# Altium PCB New GT controller.PcbDoc
Units mm, origin at the board's own origin, x right, y up, seen from the top; angles counter-clockwise.
Board outline 122 x 83 mm, 2 copper layers (Top Layer, Bottom Layer); 102 components, 65 nets, 340 pads, 71 vias.
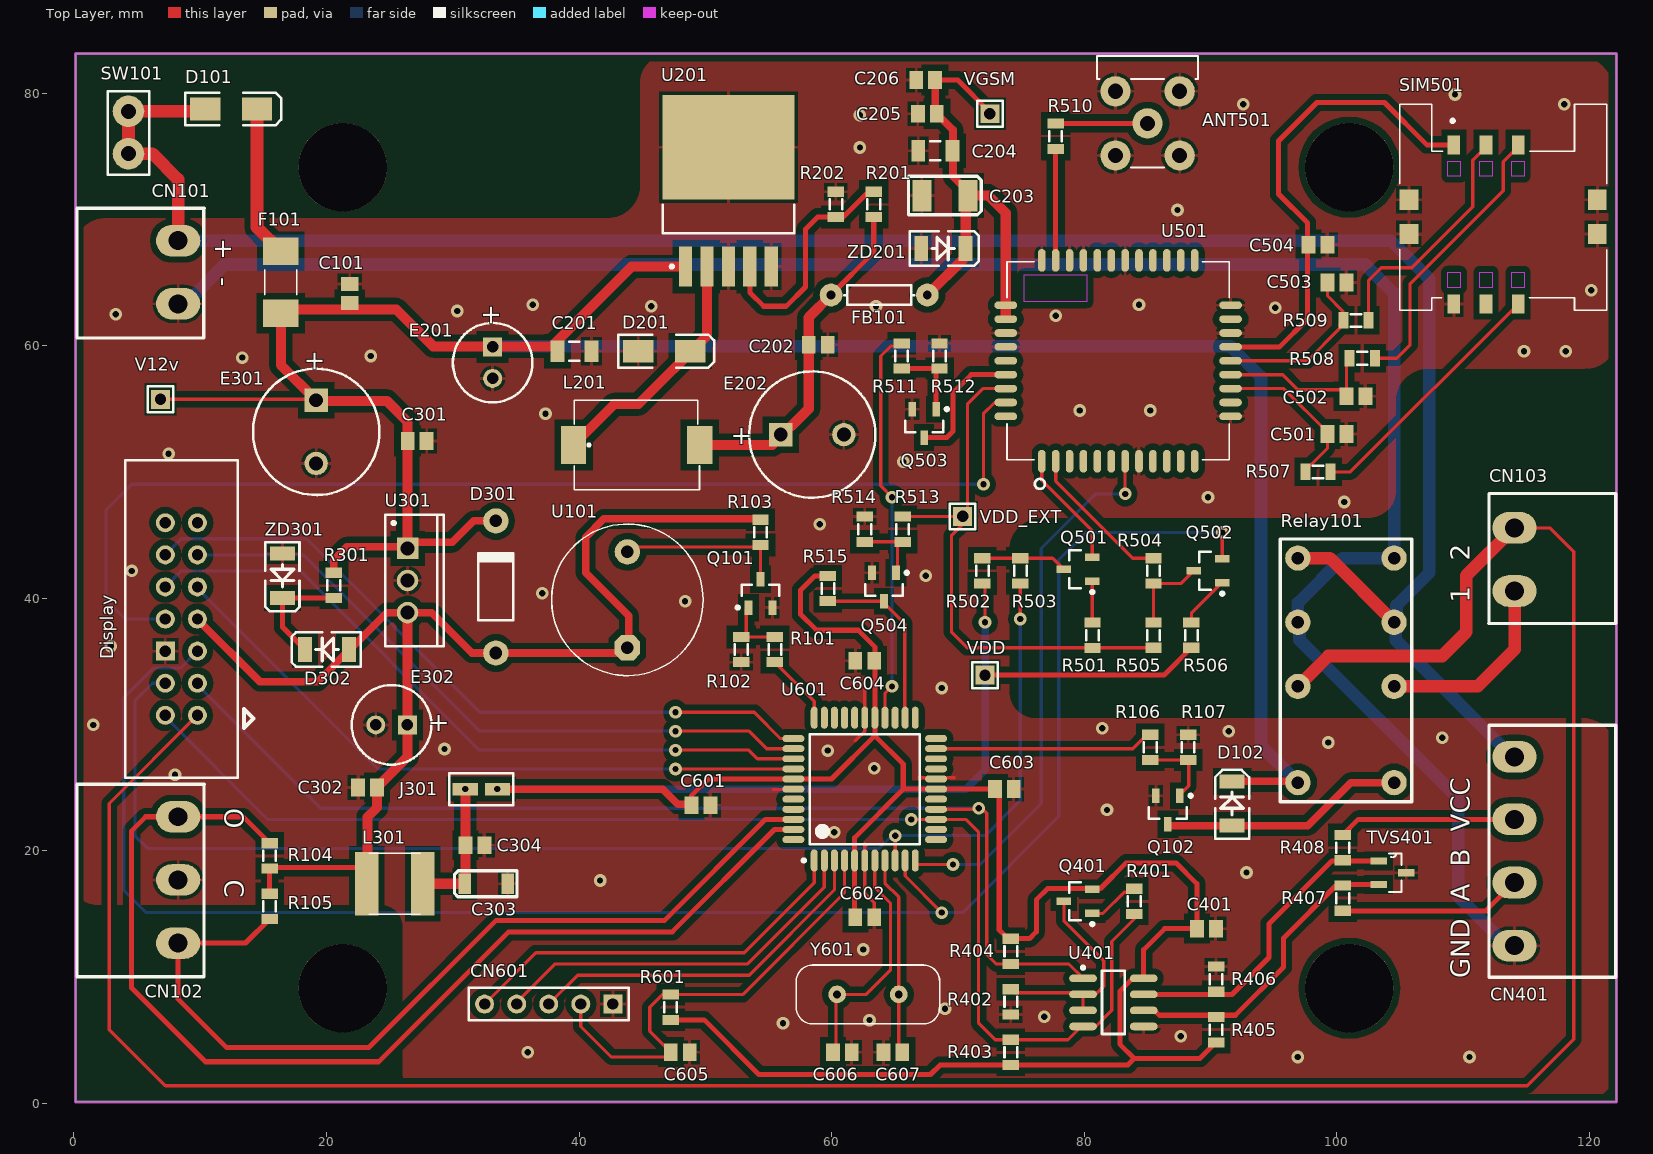
[diagram p0: Top Layer view]
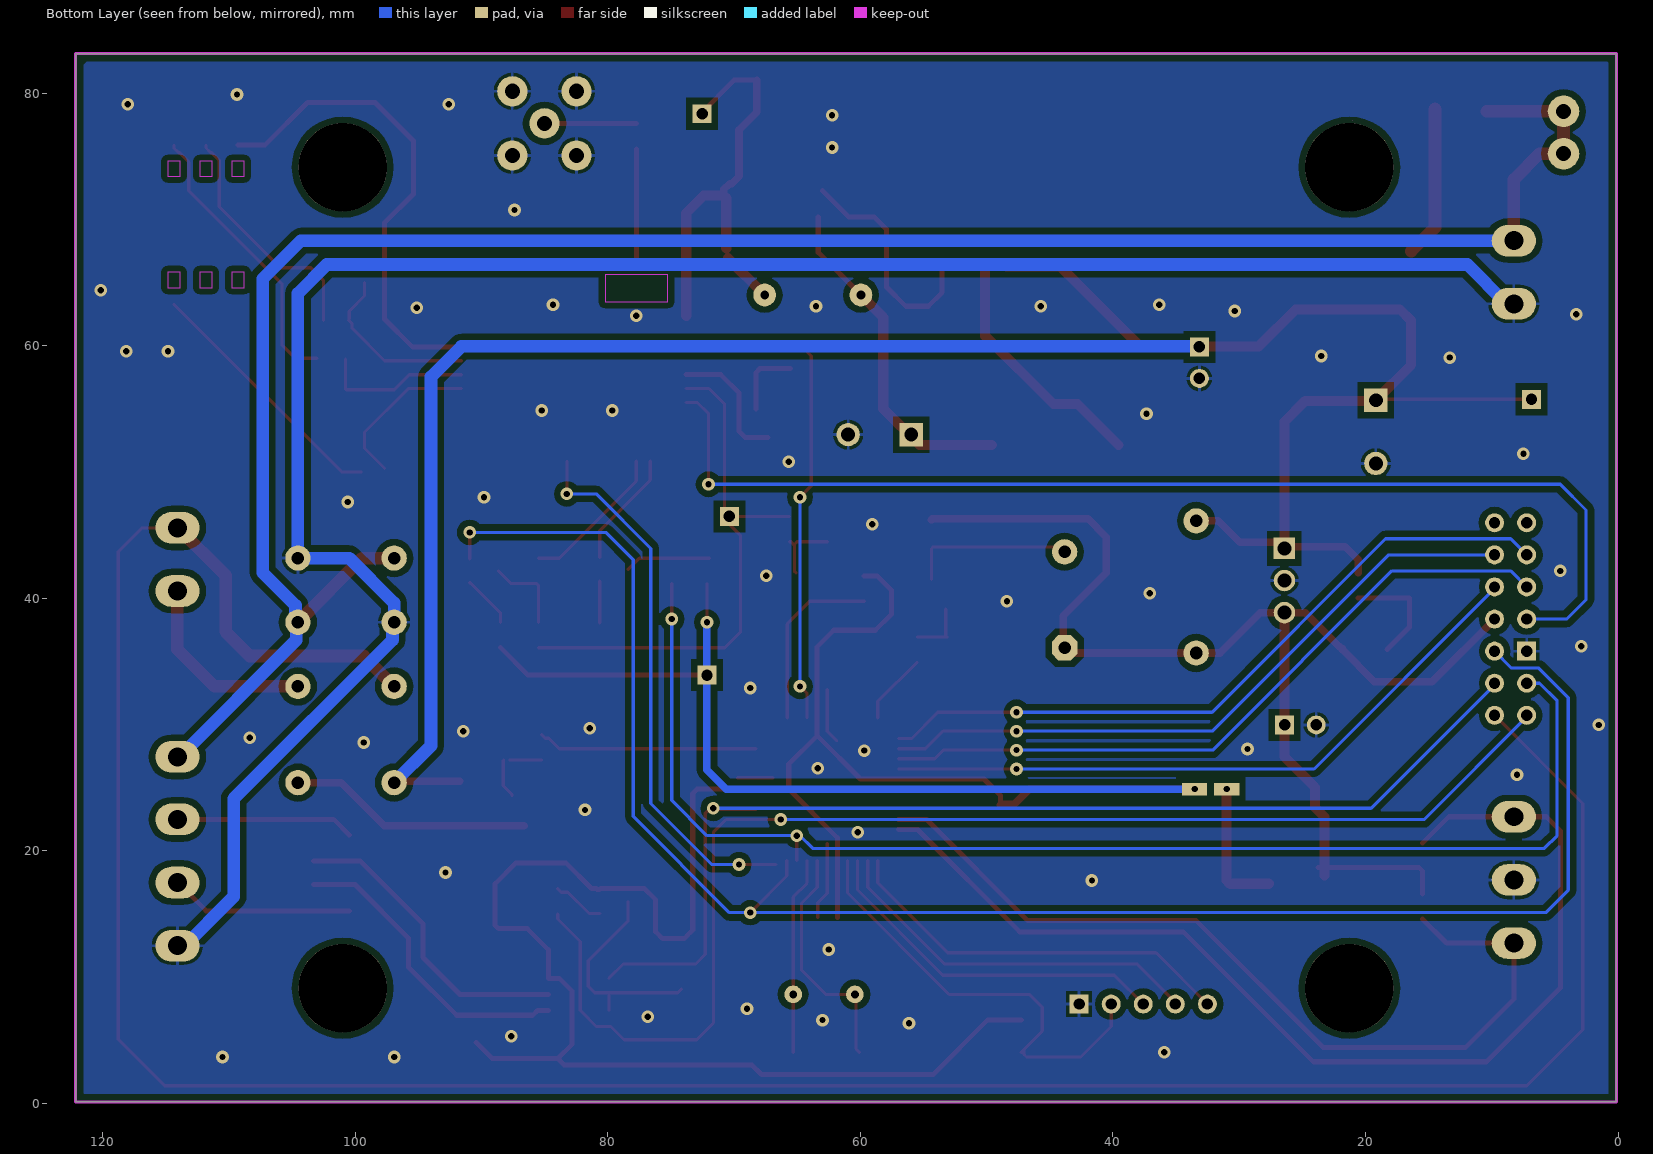
[diagram p1: Bottom Layer view, seen from below]

## Layer stack, top to bottom
Top Solder: solder mask 0.0102, Solder Resist, Dk 3.5
Top Layer: signal copper 0.0356
Dielectric 1: dielectric 0.32, FR-4, Dk 4.8
Bottom Layer: signal copper 0.0356
Bottom Solder: solder mask 0.0102, Solder Resist, Dk 3.5

## Board outline
0.127,0.127 122.127,0.127 122.127,83.127 0.127,83.127
cut-out: 21,77.81

## Design rules (kind name [scope] priority, off if disabled: settings)
Clearance [All] p1: gap=0.2 ignorepadtopadclearanceinfootprint=FALSE
PolygonConnect [All] p1: thpad.connectstyle=Relief thpad.reliefconductorwidth=0.254 thpad.reliefentries=4 thpad.polygonreliefangle="90 Angle" thpad.airgapwidth=0.254 smdpad.connectstyle=Relief smdpad.reliefconductorwidth=0.254 smdpad.reliefentries=4 smdpad.polygonreliefangle="90 Angle" smdpad.airgapwidth=0.254 via.connectstyle=Direct via.reliefconductorwidth=0.254 via.reliefentries=4 via.polygonreliefangle="90 Angle" via.airgapwidth=0.254
RoutingVias [All] p1: holewidth=0.711 width=1 viastyle="Through Hole" minholewidth=0.5 minwidth=1 maxholewidth=0.711 maxwidth=1.27
SolderMaskExpansion [All] p1: expansion=0.102 istentingtop=FALSE
Width [All] p1: maxlimit=1 minlimit=0.01 preferedwidth=0.254
30 further rules are at their usual default settings.

## Components (designator, comment, footprint, x,y, rotation, side; value= is the part's Value field where it differs from the comment)
ANT501 "SMA connector" "SMA ANTENNA CONNECTOR" 85,77.597 r0 top
C101 "Cap" C0805 21.844,64.123 r270 top value=100nF
C201 "Cap" C1206 39.624,59.563 r180 top value=1uF
C202 "Cap" C0805 58.928,60.071 r180 top value=100nF
C203 "Tantalium Cap" "Tantalium CASE B" 68.961,71.882 r180 top value=100uF
C204 "Cap" C1206 68.199,75.438 r0 top value=1uF
C205 "Cap" C0805 67.564,78.359 r0 top value=33pF
C206 "Cap" C0805 67.437,81.026 r0 top value=10pF
C301 "Cap" C0805 27.178,52.451 r180 top value=330nF
C302 "Cap" C0805 23.241,25.019 r0 top value=100nF
C303 "Tantalium Cap" "Tantalium CASE A" 32.639,17.399 r0 top value=10uF
C304 "Cap" C0805 31.762,20.447 r180 top value=100nF
C401 "Cap" C0805 89.662,13.843 r0 top value=100nF
C501 "Cap" C0805 100,53 r0 top value=22pF
C502 "Cap" C0805 101.5,56 r0 top value=22pF
C503 "Cap" C0805 100,65 r0 top value=22pF
C504 "Cap" C0805 98.5,68 r0 top value=100nF
C601 "Cap" C0805 49.657,23.622 r0 top value=100nF
C602 "Cap" C0805 62.611,14.732 r0 top value=100nF
C603 "Cap" C0805 73.66,24.892 r0 top value=100nF
C604 "Cap" C0805 62.611,35.052 r180 top value=100nF
C605 "Cap" C0805 48.006,4.064 r0 top value=100nF
C606 "Cap" C0805 60.833,4.064 r0 top value=22pF
C607 "Cap" C0805 64.833,4.064 r180 top value=22pF
CN101 "12VDC" "phoenix terminal R 2" -11.685,70.882 r270 top
CN102 "Phoenix terminal" "phoenix terminal R 3" -11.684,25.273 r270 top
CN103 "Phoenix terminal" "phoenix terminal R 2" 134,38 r90 top
CN401 "Phoenix terminal" "phoenix terminal 4" 125.745,10 r90 top
CN601 "Right Female Header 5-Pin" HDR1X5 32.512,7.874 r0 top
D101 "1N4007" SMA 12.446,78.74 r0 top
D102 "1N4148" "Mini MELF" 91.694,23.749 r270 top
D201 "SS34" SMA 46.736,59.563 r0 top
D301 "1N4001" DO-41 33.401,40.894 r90 top
D302 "1N4148" "Mini MELF" 20.038,35.941 r180 top
Display "Header 7X2" HDR2X7 9.779,30.734 r90 top
E201 "94SS107X0010DBP" D 33.147,58.654 r270 top value=100uF
E202 "94SA107X0016EBP" F0 58.46,52.959 r0 top value=330uF
E301 "94SP158X0004FBP" F0 19.177,53.173 r270 top value=1000uF
E302 "94SS107X0010DBP" D 25.146,29.972 r180 top value=220uF
F101 "Fuse SMD" "FUSE SMD 2410" 16.383,65.024 r270 top value=1A
FB101 "Ferrite Bead" AXIAL-0.3 63.754,64.008 r0 top value=270
J301 "Header 2" HDR1X2#1 30.988,24.892 r0 top
L201 "Inductor" "IND POWER RH74" 44.958,52.133 r0 top value=100uH
L301 "Inductor" "IND POWER CD54" 25.4,17.399 r0 top value=220uH
Q101 "PMBT3904" SOT-23A_N 54.356,40.386 r90 top
Q102 "PMBT3904" SOT-23A_N 86.614,23.241 r270 top
Q401 "PMBT3906" SOT-23A_N 79.502,16.002 r180 top
Q501 "PMBT3904" SOT-23A_N 79.502,42.291 r180 top
Q502 "PMBT3904" SOT-23A_N 89.789,42.164 r180 top
Q503 "PMBT3904" SOT-23A_N 67.31,53.848 r270 top
Q504 "PMBT3904" SOT-23A_N 64.135,40.894 r270 top
R101 "Res" R0805 55.499,35.941 r270 top value=4.7K
R102 "Res" R0805 52.832,35.941 r270 top value=47K
R103 "Res" R0805 54.356,45.212 r90 top value=4.7K
R104 "Res" R0805 15.494,19.605 r90 top value=4.7K
R105 "Res" R0805 15.494,15.605 r270 top value=4.7K
R106 "Res" R0805 85.217,28.194 r90 top value=4.7K
R107 "Res" R0805 88.217,28.194 r90 top value=47K
R201 "Res" R0805 63.325,71.183 r270 top value=2.2K
R202 "Res" R0805 60.325,71.183 r270 top value=1K
R301 "Res" R0805 20.574,41.021 r90 top value=10K
R401 "Res" R0805 83.947,16.002 r90 top value=7.5K
R402 "Res" R0805 74.176,8.046 r90 top value=20K
R403 "Res" R0805 74.176,4.046 r90 top value=220K
R404 "Res" R0805 74.176,12.046 r270 top value=220K
R405 "Res" R0805 90.424,5.842 r270 top value=10K
R406 "Res" R0805 90.424,9.842 r90 top value=10K
R407 "Res" R0805 100.457,16.256 r270 top value=10
R408 "Res" R0805 100.457,20.256 r90 top value=10
R501 "Res" R0805 80.645,37.068 r90 top value=4.7K
R502 "Res" R0805 71.93,42.164 r90 top value=4.7K
R503 "Res" R0805 74.93,42.164 r270 top value=470
R504 "Res" R0805 85.471,42.164 r270 top value=470
R505 "Res" R0805 85.471,37.084 r270 top value=4.7K
R506 "Res" R0805 88.471,37.084 r90 top value=4.7K
R507 "Res" R0805 98.5,50 r0 top value=22
R508 "Res" R0805 102,59 r180 top value=22
R509 "Res" R0805 101.5,62 r180 top value=22
R510 "Res" R0805 77.724,76.581 r90 top value=0
R511 "Res" R0805 65.532,59.182 r90 top value=4.7K
R512 "Res" R0805 68.532,59.182 r90 top value=47K
R513 "Res" R0805 65.611,45.466 r90 top value=4.7K
R514 "Res" R0805 62.611,45.466 r90 top value=47K
R515 "Res" R0805 59.69,40.767 r90 top value=4.7K
R601 "Res" R0805 47.244,7.62 r270 top value=4.7K
Relay101 "2C Relay 12V" "Relay v23105-a5001-a201" 100.711,34.29 r90 top
SIM501 "SIM Card Holder 6PIN" "SIM Card Holder" 113.157,69.596 r180 top
SW101 "ON/OFF" HDR1X2#2 4.318,78.549 r270 top
TVS401 "SM712" SOT23-3 104.386,18.269 r0 top
U101 "Buzzer 5v" "Buzzer 12mm" 43.815,39.878 r90 top
U201 "LM2596S-ADJ" TS5B_N 51.816,72.263 r90 top
U301 "L7805CV" TO220 26.416,41.402 r270 top
U401 "MAX485CSA" NSO8_N 82.296,8.001 r0 top
U501 "SIM800C" LCC110P1570X1760X250-42N 82.677,58.801 r90 top
U601 "ATmega32A-AU" 44A_N 62.611,24.892 r90 top
V12v "Socket" PIN1 6.858,55.753 r90 top
VDD "Socket" PIN1 72.136,33.909 r90 top
VDD_EXT "Socket" PIN1 70.358,46.482 r90 top
VGSM "Socket" PIN1 72.517,78.359 r90 top
Y601 "Crystal Oscillator" "XTAL THD" 62.865,8.636 r0 top value=11.0592Mhz
ZD201 "Diode Zener" "Mini MELF" 68.834,67.691 r0 top value=5.1v
ZD301 "Diode Zener" "Mini MELF" 16.51,41.783 r270 top value=5.6v

## Footprints (in the part's own frame and the unit in brackets; to place one, negate y for a bottom-side part, rotate by r counter-clockwise, add the part's x,y. Pads: shape width x height; smd on the part's side, far side on the other; paste and mask are expansions set on the pad)
44A_N [mm] "Thin QFP, 44-Leads, Body 10x10mm, Pitch 0.8mm, IPC Medium Density"
  oval 1.75x0.55 smd: 1(-5.65,4) 2(-5.65,3.2) 3(-5.65,2.4) 4(-5.65,1.6) 5(-5.65,0.8) 6(-5.65,0) 7(-5.65,-0.8) 8(-5.65,-1.6) 9(-5.65,-2.4) 10(-5.65,-3.2) 11(-5.65,-4) 23(5.65,-4) 24(5.65,-3.2) 25(5.65,-2.4) 26(5.65,-1.6) 27(5.65,-0.8) 28(5.65,0) 29(5.65,0.8) 30(5.65,1.6) 31(5.65,2.4) 32(5.65,3.2) 33(5.65,4)
  oval 0.55x1.75 smd: 12(-4,-5.65) 13(-3.2,-5.65) 14(-2.4,-5.65) 15(-1.6,-5.65) 16(-0.8,-5.65) 17(0,-5.65) 18(0.8,-5.65) 19(1.6,-5.65) 20(2.4,-5.65) 21(3.2,-5.65) 22(4,-5.65) 34(4,5.65) 35(3.2,5.65) 36(2.4,5.65) 37(1.6,5.65) 38(0.8,5.65) 39(0,5.65) 40(-0.8,5.65) 41(-1.6,5.65) 42(-2.4,5.65) 43(-3.2,5.65) 44(-4,5.65)
  silkscreen extent -5.77,-4.35 4.35,4.95, body extent -5,-5 5,5, height 1.2
AXIAL-0.3 [mm] "Axial Device, Thru-Hole; 2 Leads; 0.3 in Pin Spacing"
  round 1.8 hole 0.7: 1(-3.81,0) 2(3.81,0)
  silkscreen extent -2.77,-0.76 2.77,0.76
"Buzzer 12mm" [mm] "Buzzer 12mm dia, 7.6mm space"
  round 2 hole 1: N(3.8,0)
  oct 2x2 hole 1: P(-3.8,0)
  silkscreen extent -6,-6 6,6
C0805 [mm] "Chip Capacitor, Body 2.0x1.3mm, IPC High Density"
  rect 1.1x1.4 smd: 1(-0.75,0) 2(0.75,0)
  body extent -1.1,-0.72 1.1,0.72, height 1.4
C1206 [mm] "Chip Capacitor, Body 3.2x1.6mm, IPC High Density"
  rect 1.1x1.7 smd: 1(-1.35,0) 2(1.35,0)
  silkscreen extent -0.4,-0.75 0.4,0.75, body extent -1.7,-0.9 1.7,0.9, height 1.3
D [mm] "Capacitor, Electrolytic, Radial; Body 6.3 x 9.8 mm (Dia.xH typ); Pin Spacing 2.5 mm (typ)"
  rect 1.5x1.5 hole 0.9: 1(-1.25,0)
  round 1.5 hole 0.9: 2(1.25,0)
  silkscreen extent -3.15,-3.15 3.15,3.15
DO-41 [mm] "Diode, Axial; Body 5.2 x 2.7 mm (LxDia. max), Lead Dia. 0.86 mm (max)"
  round 2 hole 1: 1(-5.23,0) 2(5.23,0)
  silkscreen extent -2.65,-1.4 2.75,1.4
F0 [mm] "Capacitor, Electrolytic, Radial; Body 10 x 20 mm (Dia.xH typ); Pin Spacing 5 mm (typ)"
  rect 1.85x1.85 hole 1.1: 1(-2.5,0)
  round 1.85 hole 1.1: 2(2.5,0)
  silkscreen extent -5,-5 5,5
"FUSE SMD 2410" [mm]
  rect 2.15x2.8 smd: 1(-2.455,0) 2(2.455,0)
  silkscreen extent -1,-1.27 1,1.27
HDR1X2#1 [mm] "Connector; Header; 2 Position"
  rect 2x1 hole 0.5: 1(0,0) 2(2.54,0)
  silkscreen extent -1.27,-1.27 3.81,1.27
HDR1X2#2 [mm] "Connector; Header; 2 Position"
  round 2.5 hole 1.2: 1(0,0) 2(3.349,0)
  silkscreen extent -1.59,-1.65 5.02,1.65
HDR1X5 [mm] "Connector; Header; 5 Position"
  round 1.5 hole 0.9: 1(0,0) 2(2.54,0) 3(5.08,0) 4(7.62,0)
  rect 1.5x1.5 hole 0.9: 5(10.16,0)
  silkscreen extent -1.27,-1.27 11.43,1.27
HDR2X7 [mm] "Connector; Header; 7x2 Position"
  round 1.5 hole 0.9: 1(0,0) 2(0,2.54) 3(2.54,0) 4(2.54,2.54) 5(5.08,0) 7(7.62,0) 8(7.62,2.54) 9(10.16,0) 10(10.16,2.54) 11(12.7,0) 12(12.7,2.54) 13(15.24,0) 14(15.24,2.54)
  rect 1.5x1.5 hole 0.9: 6(5.08,2.54)
  silkscreen extent -4.95,-3.18 20.19,5.72
"IND POWER CD54" [mm] "SMD Power Inductor ; Size:5*5*4"
  rect 1.85x5 smd: 1(-2.225,0) 2(2.225,0)
  silkscreen extent -2,-2.41 2,2.41, body extent -2,-2 2,2, height 4.5
"IND POWER RH74" [mm] "SMD Power Inductor ; Size:7*7*4"
  rect 2x3 smd: 1(-5.4,0) 2(4.6,0)
  silkscreen extent -5.33,-3.56 4.57,3.56
LCC110P1570X1760X250-42N [mm]
  oval 1.8x0.6 smd: 1(-7.95,6.05) 2(-7.95,4.95) 3(-7.95,3.85) 4(-7.95,2.75) 5(-7.95,1.65) 6(-7.95,0.55) 7(-7.95,-0.55) 8(-7.95,-1.65) 9(-7.95,-2.75) 10(-7.95,-3.85) 11(-7.95,-4.95) 12(-7.95,-6.05) 22(7.95,-6.05) 23(7.95,-4.95) 24(7.95,-3.85) 25(7.95,-2.75) 26(7.95,-1.65) 27(7.95,-0.55) 28(7.95,0.55) 29(7.95,1.65) 30(7.95,2.75) 31(7.95,3.85) 32(7.95,4.95) 33(7.95,6.05)
  oval 0.6x1.8 smd: 13(-4.4,-8.9) 14(-3.3,-8.9) 15(-2.2,-8.9) 16(-1.1,-8.9) 17(0,-8.9) 18(1.1,-8.9) 19(2.2,-8.9) 20(3.3,-8.9) 21(4.4,-8.9) 34(4.4,8.9) 35(3.3,8.9) 36(2.2,8.9) 37(1.1,8.9) 38(0,8.9) 39(-1.1,8.9) 40(-2.2,8.9) 41(-3.3,8.9) 42(-4.4,8.9)
  Keep-Out Layer region: 6.8,2.483 4.656,2.483 4.656,7.43 6.8,7.43
  silkscreen extent -10.15,-8.8 7.85,8.8
"Mini MELF" [mm] "Mini MELF; 3.5mm*1.45mm"
  rect 1.1x2 smd: 1(-1.75,0) 2(1.75,0)
  silkscreen extent -2.67,-1.35 2.79,1.35
NSO8_N [mm] "SOIC, 8-Leads, Body 4.9x3.9mm, Pitch 1.27mm, IPC Medium Density"
  oval 2.2x0.6 smd: 1(-2.4,1.905) 2(-2.4,0.635) 3(-2.4,-0.635) 4(-2.4,-1.905) 5(2.4,-1.905) 6(2.4,-0.635) 7(2.4,0.635) 8(2.4,1.905)
  silkscreen extent -2.52,-2.5 0.9,2.88, body extent -2,-2.5 2,2.5, height 1.75
"phoenix terminal 4" [mm] "4 terminals"
  oval 2.5x3.5 hole 1.5: 1(2.493,11.684) 2(7.493,11.684) 3(12.493,11.684) 4(17.446,11.684)
  silkscreen extent 0,3.68 19.94,13.72
"phoenix terminal R 2" [mm] "2 Right terminals"
  oval 2.5x3.5 hole 1.5: 1(2.573,19.939) 2(7.573,19.939)
  silkscreen extent 0,11.94 10.29,22
"phoenix terminal R 3" [mm] "3 Right terminals"
  oval 2.5x3.5 hole 1.5: 1(2.573,19.939) 2(7.573,19.939) 3(12.573,19.939)
  silkscreen extent 0,11.94 15.24,22
PIN1 [mm] "Connector; Plug"
  rect 1.5x1.5 hole 0.9: 1(0,0)
  silkscreen extent -1.02,-1.02 1.02,1.02
R0805 [mm] "Chip Resistor, Body 2x1.3mm, IPC High Density"
  rect 0.8x1.3 smd: 1(-1,0) 2(1,0)
  silkscreen extent -0.4,-0.5 0.4,0.5, body extent -1.05,-0.65 1.05,0.65, height 0.9
"Relay v23105-a5001-a201" [mm]
  round 2 hole 1: 1(-8.89,-3.81) 4(-1.27,-3.81) 6(3.81,-3.81) 8(8.89,-3.81) 9(8.89,3.81) 11(3.81,3.81) 13(-1.27,3.81) 16(-8.89,3.81)
  silkscreen extent -10.4,-5.2 10.4,5.2, body extent -10.14,-4.99 10.06,5.01, height 11.41
"SIM Card Holder" [mm] "6 Position Card Connector SIM Card Surface Mount, Right Angle Gold"
  rect 1x1.5 smd: 1(3.9,-6.3) 2(1.36,-6.3) 3(-1.18,-6.3) 4(3.9,6.3) 5(1.36,6.3) 6(-1.18,6.3)
  rect 1.5x1.6 smd: S1(-7.45,0.75) S2(-7.45,-1.95) S3(7.45,0.75) S4(7.45,-1.95)
  Keep-Out Layer region: 4.4,-5 3.4,-5 3.4,-3.8 4.4,-3.8
  Keep-Out Layer region: 1.86,-5 0.86,-5 0.86,-3.8 1.86,-3.8
  Keep-Out Layer region: -0.68,-5 -1.68,-5 -1.68,-3.8 -0.68,-3.8
  Keep-Out Layer region: 4.4,3.8 3.4,3.8 3.4,5 4.4,5
  Keep-Out Layer region: 1.86,3.8 0.86,3.8 0.86,5 1.86,5
  Keep-Out Layer region: -0.68,3.8 -1.68,3.8 -1.68,5 -0.68,5
  silkscreen extent -8.2,-9.5 8.2,6.8
SMA [mm] "DO-214-AC/SMA; 2 C-Bend Leads; Body 5 x 2.7 mm, inc. leads (LxW)"
  rect 2.4x1.8 smd: 1(-2.05,0) 2(2.05,0)
  silkscreen extent -3.65,-1.3 3.95,1.3
"SMA ANTENNA CONNECTOR" [mm]
  round 2.4 hole 1.2: 1(0,0) 2(-2.54,-2.54) 2(-2.54,2.54) 2(2.54,-2.54) 2(2.54,2.54)
  silkscreen extent -3.99,-3.51 3.99,5.33
SOT23-3 [mil]
  rect 52x22 smd: 1(-43,37) 2(-43,-37) 3(43,0)
  silkscreen extent -11,-60 28,60
SOT-23A_N [mm] "SOT23, 3-Leads, Body 2.9x1.3mm, Pitch 0.95mm, Lead Span 2.3mm, IPC Medium Density"
  rect 1.15x0.6 smd: 1(-1.125,0.95) 2(-1.125,-0.95) 3(1.125,0)
  silkscreen extent -1.25,-1.5 0.7,1.92, body extent -0.7,-1.5 0.7,1.5, height 1.09
"Tantalium CASE A" [mm]
  rect 1x1.6 smd paste+0.038 mask+0.038: 1(-1.7,0) 2(1.7,0)
  silkscreen extent -2.5,-1.02 2.45,1.02, body extent -1.7,-0.9 1.7,0.9, height 1.8
"Tantalium CASE B" [mm]
  rect 1.5x2.5 smd paste+0.038 mask+0.038: 1(-1.831,0) 2(1.832,0)
  silkscreen extent -2.88,-1.53 2.88,1.53, body extent -1.83,-1.4 1.83,1.4, height 1.95
TO220 [mm] "TO, Thru-Hole, Vertical, Heatsink Mounted; 3 In-Line Leads; Pitch 2.54 mm"
  rect 1.7x1.7 hole 1.1: 1(-2.54,0)
  round 1.7 hole 1.1: 2(0,0) 3(2.54,0)
  silkscreen extent -5.2,-1.75 5.2,2.85, body extent -5.25,-1.8 5.25,2.9, height 19.7
TS5B_N [mm] "D2-PAK, 6-Leads, Body 8.6x10.2mm, Pitch 1.7mm, Lead Span 14.1mm, IPC Medium Density"
  rect 3.2x1.05 smd: 1(-6,3.4) 2(-6,1.7) 3(-6,0) 4(-6,-1.7) 5(-6,-3.4)
  rect 8.3x10.45 smd: 6(3.45,0)
  silkscreen extent -6.12,-5.2 -1.1,5.2, body extent -3.35,-5.2 6.05,5.2, height 4.65
"XTAL THD" [mm]
  round 1.4 hole 0.63: 1(-2.44,0) 2(2.44,0)
  silkscreen extent -5.68,-2.33 5.68,2.33

## Part data
ANT501: "SMA Connector Plug, Male Pin 50Ohm Through Hole, Right Angle Solder", Package=None, Availability=Unavailable, MF="Amphenol RF", MP=901-9894-RFX, Price=None, SnapEDA_Link=https://www.snapeda.com/parts/901-9894-RFX/Amphenol%20RF%20Division/view-part/34657/?ref=snap
C101 C201 C202 C204 C205 C206 C301 C302 C304 C401 C501 C502 C503 C504 C601 C602 C603 C604 C605 C606 C607: "Capacitor"
C203 C303: library part "Cap Pol2", "Polarized Capacitor Tantalium"
CN101 CN103: library part "Phoenix terminal R 2", "Right Terminal 2 Pin", ComponentLinkURL=www.picpars.com, Designer="Seyed Mohsen Ghasemain", E-mail=picpars@gmail.com
CN102: library part "Phoenix terminal R 3", "Right Terminal 3 Pin", ComponentLinkURL=www.picpars.com, Designer="Seyed Mohsen Ghasemain", E-mail=picpars@gmail.com
CN401: library part "Phoenix terminal 4", "Terminal 4 Pin", ComponentLinkURL=www.picpars.com, Designer="Seyed Mohsen Ghasemain", E-mail=picpars@gmail.com
CN601: library part "Header 5", "Header, 5-Pin", LatestRevisionDate=17-Jul-2002, LatestRevisionNote="Re-released for DXP Platform.", Publisher="Altium Limited"
D101: library part Diode, "Default Diode", Code_JEDEC=DO-214-AB, LatestRevisionDate=17-Jul-2002, LatestRevisionNote="Re-released for DXP Platform.", PackageDescription="DO-214-AB/SMC; 2 C-Bend Leads; Body 7.9 x 5.9 mm, inc. leads (LxW)", PackageReference=SMC, PackageVersion=Sep-1996, Published=8-Jun-2000, Publisher="Altium Limited"
D102 D302: library part "Diode 1N4148", "High Conductance Fast Diode", PackageDescription=Diode
D201: library part SS36, "Schottky Rectifier", PackageDescription="DO-214-AB/SMC; 2 C-Bend Leads; Body 7.9 x 5.9 mm, inc. leads (LxW)"
D301: "1.0 Ampere General Purpose Rectifier", PackageDocument=Aug-1999, Code_JEDEC=DO-204-AL, ComponentLink1Description="Manufacturer Link", ComponentLink1URL=http://www.fairchildsemi.com/, ComponentLink2Description="Pinout Specification", ComponentLink2URL=http://www.fairchildsemi.com/ds/1N%2F1N4001.pdf, DatasheetDocument=1998, LatestRevisionDate=17-Jul-2002, LatestRevisionNote="Re-released for DXP Platform.", PackageReference=DO-41, Published=8-Jun-2000, Publisher="Altium Limited"
Display: "Header, 7-Pin, Dual row", LatestRevisionDate=17-Jul-2002, LatestRevisionNote="Re-released for DXP Platform.", Publisher="Altium Limited"
E201 E302: "Solid Aluminum Capacitor with Organic Semiconductor Electrolyte: 100uF, 10V, Bulk Pack", ComponentLink1Description="Manufacturer Link", ComponentLink1URL=http://www.vishay.com/, ComponentLink2Description=Datasheet, ComponentLink2URL=http://www.vishay.com/docs/90008/94ss.pdf, DatasheetDocument=23-May-2001, DrillSize="Nominal, Rounded to the nearest 0.1mm", Note="Part Numbers shown are for ± 20% capacitance tolerance (X0).", PackageReference=D, PCB_Layout="Complies with Manufacturer's Recommendation.", Published=19-Mar-2004, Publisher="Altium Limited"
E202: "Solid Aluminum Capacitor with Organic Semiconductor Electrolyte: 100uF, 16V, Bulk Pack", ComponentLink1Description="Manufacturer Link", ComponentLink1URL=http://www.vishay.com/, ComponentLink2Description=Datasheet, ComponentLink2URL=http://www.vishay.com/docs/90003/94sa.pdf, DatasheetDocument=29-Jun-2001, DrillSize="Nominal, Rounded to the nearest 0.1mm", Note="Part Numbers shown are for ± 20% capacitance tolerance (X0).", PackageReference=E, PCB_Layout="Complies with Manufacturer's Recommendation.", Published=19-Mar-2004, Publisher="Altium Limited"
E301: "Solid Aluminum Capacitor with Organic Semiconductor Electrolyte: 1500uF, 4V, Bulk Pack", ComponentLink1Description="Manufacturer Link", ComponentLink1URL=http://www.vishay.com/, ComponentLink2Description=Datasheet, ComponentLink2URL=http://www.vishay.com/docs/90009/94sp.pdf, DatasheetDocument=2-Jul-2001, DrillSize="Nominal, Rounded to the nearest 0.1mm", Note="Part Numbers shown are for ± 20% capacitance tolerance (X0).", PackageReference=F0, PCB_Layout="Complies with Manufacturer's Recommendation.", Published=19-Mar-2004, Publisher="Altium Limited"
F101: "2410 SMT Fuse", Package="SMD-2 Bel Fuse", Availability=Warning, MF="Bel Fuse", MP=0679L1000-05, Price=None, Purchase-URL=https://pricing.snapeda.com/search/part/0679L1000-05/?ref=eda, SnapEDA_Link=https://www.snapeda.com/parts/0679L1000-05/Bel%20Fuse/view-part/1313867/?ref=snap
J301: "Header, 2-Pin", LatestRevisionDate=17-Jul-2002, LatestRevisionNote="Re-released for DXP Platform.", Publisher="Altium Limited"
L201 L301: "Inductor SMD", PackageDescription=Inductor
Q101 Q102 Q501 Q502 Q503 Q504: library part BC817-25, "NPN General Purpose Amplifier", ComponentLink1Description="Manufacturer Link", ComponentLink1URL=http://www.fairchildsemi.com/, ComponentLink2Description="Discontinuation Notice", ComponentLink2URL=http://www.fairchildsemi.com/obsolete/obs.jsp, DatasheetVersion=1997, LatestRevisionDate=20-Nov-2009, LatestRevisionNote="IPC-7351 Footprint Added.", PackageDescription="3-Pin SOT-23 Package 0.95 mm Pitch, 2.3 mm Lead Span", PackageReference=SOT-23A, PackageVersion=Sep-1998, Published=8-Jun-2000, Publisher="Altium Limited"
Q401: library part BC807-25, "PNP General Purpose Amplifier", ComponentLink1Description="Manufacturer Link", ComponentLink1URL=http://www.fairchildsemi.com/, ComponentLink2Description=Datasheet, ComponentLink2URL=http://www.fairchildsemi.com/ds/BC%2FBC807.pdf, DatasheetVersion=1997, LatestRevisionDate=20-Nov-2009, LatestRevisionNote="IPC-7351 Footprint Added.", PackageDescription="3-Pin SOT-23 Package 0.95 mm Pitch, 2.3 mm Lead Span", PackageReference=SOT-23A, PackageVersion=Sep-1998, Published=8-Jun-2000, Publisher="Altium Limited"
R101 R102 R103 R104 R105 R106 R107 R201 R202 R301 R401 R402 R403 R404 R405 R406 R407 R408 R501 R502 R503 R504 R505 R506 R507 R508 R509 R510 R511 R512 R513 R514 R515 R601: "Resistor", PackageDescription="Chip Resistor"
Relay101: library part Relay-8Pin, "2C Telecommunication Relay"
SIM501: "6 Position Card Connector SIM Card Surface Mount, Right Angle Gold", Package=None, Availability=Unavailable, MF="Wurth Electronics", MP=693010020611, Price=None, SnapEDA_Link=https://www.snapeda.com/parts/693010020611/Wurth%20Electronics%20Inc./view-part/514470/?ref=snap
SW101: library part "Header 2", "Header, 2-Pin", LatestRevisionDate=17-Jul-2002, LatestRevisionNote="Re-released for DXP Platform.", Publisher="Altium Limited"
TVS401: "31V, 19V Clamp 19A _8/20Âµs_ Ipp Tvs Diode Surface Mount SOT-23-3", Package="SOT-23 Semtech", Availability=Unavailable, MF=Semtech, MP=SM712, Price=None, SnapEDA_Link=https://www.snapeda.com/parts/SM712/Semtech/view-part/4219095/?ref=snap
U101: library part "Buzzer passive 12mm", "12 mm, 5 Vdc, 85 dB, Through Hole, Driving Circuit, Magnetic Audio Indicator Buzzer", Package="CUI Inc.", Availability=Unavailable, CUI_purchase_URL=https://www.cuidevices.com/product/audio/buzzers/audio-indicators/cmi-1295-0585t?utm_source=snapeda.com&utm_medium=referral&utm_campaign=snapedaBOM, MF="CUI Devices", MP=CMI-1295-0585T, Price=None, SnapEDA_Link=https://www.snapeda.com/parts/CMI-1295-0585T/CUI%20Devices/view-part/3662512/?ref=snap
U201: "SIMPLE SWITCHER® Power Converter 150 KHz 3A Step-Down Voltage Regulator, 5-pin TO-263", PackageDescription="TO-263, Molded, .400 x .390 x .180in, 5 Lead, .067in Pitch, Surface Mount", PartNumber=LM2596S-ADJ, PinCount=5
U301: "Positive Voltage Regulator, 5V, 3-Pin TO-220", ComponentLink1Description="Manufacturer URL", ComponentLink1URL=http://www.st.com, ComponentLink2Description=Datasheet, ComponentLink2URL=http://www.st.com/internet/com/TECHNICAL_RESOURCES/TECHNICAL_LITERATURE/DATASHEET/CD00000444.pdf, ComponentLink3Description="Package Specification", ComponentLink3URL=http://www.st.com/internet/com/TECHNICAL_RESOURCES/TECHNICAL_LITERATURE/PACKAGE_INFORMATION/CD00004649.pdf, DatasheetVersion=Nov-2011, PackageDescription="TO, Thru-Hole, Vertical, Heatsink Mounted; 3 In-Line Leads; Pitch 2.54 mm", PackageReference=TO220, PackageVersion=ver3.0, PartNumber=L7805CV
U401: "Low-Power, Slew-Rate-Limited RS-485/RS-422 Transceiver", Code_IPC=SOIC127P600-8, Code_JEDEC=MS-012-AA, ComponentLink1Description="Manufacturer Link", ComponentLink1URL=http://www.maxim-ic.com/, ComponentLink2Description=Datasheet, ComponentLink2URL=http://pdfserv.maxim-ic.com/en/ds/MAX1487-MAX491.pdf, DatasheetVersion=Feb-1996, LatestRevisionDate=13-Apr-2006, LatestRevisionNote="IPC-7351 Footprint Added.", PackageDescription="8-Pin Small Outline Integrated Circuit 1.27 mm Pitch", PackageReference=NSO8, Published=16-Jan-2001, Publisher="Altium Limited"
U501: "Module: GSM/Bluetooth; GPRS; 2G; 1800MHz, 900MHz; 85.6kbps; SMD", Package=None, Availability=Unavailable, MF=Simcom, MP=SIM800C, Price=None, SnapEDA_Link=https://www.snapeda.com/parts/SIM800C/SIMcom%20Wireless%20solutions%20Co.%2CLtd/view-part/571323/?ref=snap
U601: "8-bit AVR Microcontroller, 2.7-5.5V, 16MHz, 32KB Flash, 1KB EEPROM, 2KB SRAM, 44-pin TQFP, Industrial Grade (-40°C to 85°C)", Code_JEDEC=MS-026-ACB, ComponentLink1Description="Manufacturer URL", ComponentLink1URL=http://www.atmel.com/, ComponentLink2Description="ATmega32A Datasheet", ComponentLink2URL=http://www.atmel.com/dyn/resources/prod_documents/doc8155.pdf, ComponentLink3Description="ATmega32A Summary", ComponentLink3URL=http://www.atmel.com/dyn/resources/prod_documents/8155S.pdf, DatasheetVersion="revC, Feb-2011", PackageDescription="44-Pin Plastic Thin Profile Quad Flat Pack, 10 x 10 x 1.0 mm Body, 0.8 mm Pitch (TQFP)", PackageReference=44A, PackageVersion="revC, Oct-2010"
Y601: "10MHz ±30ppm Crystal 18pF 60 Ohms", Package="HC49/US ECS International", Digi-Key_Part_Number=X1080-ND, MF="ECS Inc.", MP=ECS-100-18-4X, SnapEDA_Link=https://www.snapeda.com/parts/ECS-100-18-4X/ECS%20Inc./view-part/583488/?ref=snap
ZD201 ZD301: "Zener Diode", PackageDescription="Zener Diode"
FB101: PackageDescription="Chip Inductor"
V12v VDD VDD_EXT VGSM: LatestRevisionDate=17-Jul-2002, LatestRevisionNote="Re-released for DXP Platform.", Publisher="Altium Limited"

## Free pads (board coordinates)
  round 7 hole 7 unplated: 0(21.277,9.127) 0(21.277,74.127) 0(100.977,9.127) 0(100.977,74.127)

## Via types
v1: diameter 1, hole 0.5, Top Layer to Bottom Layer, tented both sides, 71 vias

## Nets (pads, with @x,y where several pads share a name; then routed paths per layer and width w, separated by ;. In a path a pad name is that pad's centre, name@x,y a point inside that pad or via, vN(x,y) a via of type N, cw(c..) or ccw(c..) an arc to the next point about the centre after c; other vN are vias at no path point)
GND: ANT501.2 C101.1 C201.1 C202.1 C203.2 C204.1 C205.1 C206.1 C301.1 C302.1 C303.2 C304.1 C401.2 C501.2 C502.2 C503.2 C504.2 C601.2 C602.2 C603.2 C604.2 C605.2 C606.2 C607.2 CN101.2 CN102.2 CN401.1 CN601.5 D201.1 Display.6 E201.2 E202.2 E301.2 E302.2 Q101.2 Q102.2 Q503.2 Q504.2 R102.2 R107.2 R202.1 R402.1 R406.2 R512.2 R514.2 Relay101.8 Relay101.11 SIM501.4 SIM501.S1 SIM501.S2 SIM501.S3 SIM501.S4 TVS401.3 U201.3 U201.5 U201.6 U301.2 U401.5 U501.8 U501.13 U501.19 U501.21 U501.27 U501.30 U501.31 U501.33 U501.36 U501.37 U601.6 U601.18 U601.28 U601.39 ZD201.1 ZD301.1 | length 177.9
  Top Layer w0.254: 55.372,24.852 U601.39@56.961,24.852 ; 61.849,28.702 62.611,29.464 U601.28 62.611,32.766 ; 62.611,20.574 U601.6 62.611,16.637 63.361,15.887 C602.2 ; 66.929,25.781 69.723,25.781
  Bottom Layer w1: CN101.2 8.826,63.309 11.938,66.421 102.235,66.421 104.521,64.135 Relay101.8 100.457,43.18 96.907,39.63 96.907,38.106 Relay101.11 97.034,37.967 97.034,36.697 109.601,24.13 109.601,16.383 CN401.1@113.792,12.192
  other v1: 96.901,3.683 110.49,3.683 35.941,4.064 87.63,5.334 56.134,6.35 62.992,6.604 76.835,6.858 68.961,7.493 62.484,12.192 41.656,17.653 92.837,18.288 60.198,21.463 81.788,23.241 8.001,26.035 63.373,26.543 59.69,27.94 29.337,28.067 99.314,28.575 108.331,28.956 91.44,29.464 81.407,29.718 1.524,29.972 68.707,32.893 2.921,36.195 48.387,39.751 37.084,40.386 67.437,41.783 4.572,42.164 59.055,45.847 100.584,47.625 89.789,48.006 65.659,50.8 7.493,51.435 37.338,54.61 79.629,54.864 85.217,54.864 13.335,59.055 23.495,59.182 114.808,59.563 118.11,59.563 77.724,62.357 3.302,62.484 30.353,62.738 95.123,62.992 45.72,63.119 63.5,63.119 36.322,63.246 84.328,63.246 120.142,64.389 87.376,70.739 62.23,75.692 62.23,78.232 92.583,79.121 117.983,79.121 109.347,79.883
NetANT501_1: ANT501.1 R510.2 | length 7.3
  Top Layer w0.4: R510.2@77.724,77.597 ANT501.1
NetC202_2: C202.2 E202.1 FB101.1 L201.2 R201.2 | length 27.1
  Top Layer w0.4: FB101.1 63.325,67.389 R201.2
  Top Layer w0.8: L201.2 55.308,52.133 58.178,55.003 C202.2 58.178,62.242 FB101.1
NetC303_1: C303.1 C304.2 J301.1 L301.2 | length 10.7
  Top Layer w0.8: L301.2 30.734,17.399 30.988,17.653 J301.1
NetC501_1: C501.1 R507.1 U501.15 | length 12.6
  Top Layer w0.254: U501.15 95.799,56.601 99.25,53.15 C501.1 99.25,51.879 R507.1@97.663,50.292
NetC502_1: C502.1 R508.2 U501.16 | length 12.1
  Top Layer w0.254: U501.16 95.715,57.701 96.901,56.515 100.711,56.515 100.75,56.554 R508.2@100.75,58.928
NetC503_1: C503.1 R509.2 U501.17 | length 13.9
  Top Layer w0.254: U501.17 97.663,58.801 100.227,61.365 100.227,61.727 R509.2 ; C503.1 99.25,63.945 100.457,62.738 R509.2@100.457,62.103
NetC504_1: C504.1 SIM501.1 U501.18 | length 38.6
  Top Layer w0.4: U501.18 95.461,59.901 97.663,62.103 97.663,69.723 95.377,72.009 95.377,76.2 98.425,79.248 103.759,79.248 107.111,75.896 SIM501.1
NetC605_1: C605.1 CN601.4 R601.1 U601.4 | length 36.1
  Top Layer w0.254: CN601.4 40.132,6.096 42.545,3.683 46.833,3.683 47.06,3.91 C605.1@47.06,4.261 ; C605.1 C605.1@47.06,4.261 ; U601.4 61.011,16.688 52.943,8.62 R601.1 46.593,8.62 45.593,7.62 45.593,5.727 C605.1@47.06,4.261
NetC606_1: C606.1 U601.7 Y601.1 | length 18.9
  Top Layer w0.254: C606.1 60.325,4.306 60.325,8.509 60.452,8.636 62.738,8.636 64.643,10.541 64.643,15.875 63.411,17.107 U601.7
NetC607_1: C607.1 U601.8 Y601.2 | length 15.6
  Top Layer w0.254: U601.8 64.211,17.45 65.305,16.356 Y601.2 C607.1@65.305,4.064
NetCN102_1: CN102.1 R104.2 U601.43 | length 87.1
  Top Layer w0.4: R104.2 13.399,22.7 CN102.1 5.682,22.7 4.572,21.59 4.572,9.144 10.414,3.302 24.13,3.302 34.417,13.589 47.371,13.589 55.474,21.692 U601.43
NetCN102_3: CN102.3 R105.2 U601.42 | length 70.2
  Top Layer w0.4: R105.2 13.589,12.7 8.382,12.7 8.255,12.573 8.255,8.255 12.065,4.445 23.368,4.445 33.401,14.478 46.736,14.478 54.75,22.492 U601.42
NetCN103_1: CN103.1 Relay101.4 | length 15.6
  Top Layer w1: Relay101.4@104.3,33.02 111.125,33.02 114.061,35.956 CN103.1
NetCN401_2: CN401.2 R407.2 | length 14.5
  Top Layer w0.4: R407.2 111.776,15.256 114.013,17.493 CN401.2
NetCN401_3: CN401.3 R408.2 | length 14.1
  Top Layer w0.4: R408.2 101.694,22.493 CN401.3
NetCN601_1: CN601.1 U601.1 | length 31.8
  Top Layer w0.254: CN601.1 36.576,11.938 53.086,11.938 58.611,17.463 U601.1
NetCN601_2: CN601.2 U601.2 | length 30.4
  Top Layer w0.254: CN601.2 35.052,8.001 38.1,11.049 53.34,11.049 59.411,17.12 U601.2
NetCN601_3: CN601.3 U601.3 | length 28.7
  Top Layer w0.254: CN601.3 39.878,10.16 53.467,10.16 60.211,16.904 U601.3
NetD101_2: D101.2 F101.1 | length 12
  Top Layer w1: D101.2 14.496,69.366 F101.1
NetD102_2: D102.2 Q102.3 Relay101.1 | length 19.3
  Top Layer w0.6: Q102.3@86.614,21.999 D102.2 97.691,21.999 101.092,25.4 Relay101.1
NetD201_2: D201.2 L201.1 U201.2 | length 19.6
  Top Layer w0.8: L201.1 42.797,55.372 44.704,55.372 50.116,60.784 U201.2
NetD302_2: D302.2 R301.1 ZD301.2 | length 8.9
  Top Layer w0.4: D302.2 16.51,37.719 16.51,40.005 16.526,40.021 R301.1
NetDisplay_2: Display.2 R401.1 R403.2 U401.4 U601.14 | length 103.7
  Top Layer w0.254: v1@66.421,22.492 U601.14 70.599,22.492 71.628,21.463 71.628,6.364 72.946,5.046 R403.2 78.706,5.046 79.756,6.096 U401.4 80.899,6.096 82.169,7.366 82.169,12.827 83.947,14.605 R401.1
  Bottom Layer w0.254: Display.2 7.239,30.607 15.367,22.479 v1(66.294,22.479)
NetDisplay_3: Display.3 R404.2 U401.1 U601.15 | length 89.4
  Top Layer w0.254: U601.15 v1@71.45,23.292 ; v1(71.628,23.368) 71.83,23.368 72.072,23.126 72.124,23.126 72.263,22.987 72.263,11.811 73.028,11.046 R404.2 78.756,11.046 U401.1
  Bottom Layer w0.254: Display.3@9.842,33.084 19.558,23.368 v1(71.628,23.368)
NetDisplay_4: Display.4 R503.2 U601.9 | length 104.9
  Top Layer w0.254: U601.9@65.024,19.255 v1(65.024,21.209) ; v1(74.93,38.354) R503.2
  Bottom Layer w0.254: Display.4 6.223,33.274 4.826,31.877 4.826,21.209 5.842,20.193 63.754,20.193 64.77,21.209 v1(65.024,21.209) 72.136,21.209 74.93,24.003 v1(74.93,38.354)
NetDisplay_5: Display.5 Q502.2 U601.10 | length 142.1
  Top Layer w0.254: U601.10 65.811,18.009 v1(68.707,15.113) ; Q502.2 v1(90.914,45.212)
  Bottom Layer w0.254: Display.5 8.44,34.475 6.281,34.475 3.937,32.131 3.937,16.891 5.715,15.113 v1(68.707,15.113) 70.358,15.113 77.978,22.733 77.978,43.053 80.137,45.212 v1(90.914,45.212)
NetDisplay_8: Display.8 U501.41 | length 90.5
  Top Layer w0.254: v1(72.009,49.022) 72.009,54.61 72.9,55.501 U501.41
  Bottom Layer w0.254: Display.8 4.064,38.354 2.54,39.878 2.54,46.99 4.572,49.022 v1(72.009,49.022)
NetDisplay_9: Display.9 U601.37 | length 53.1
  Top Layer w0.254: v1@47.752,26.492 U601.37
  Bottom Layer w0.254: Display.9@9.716,40.831 24.067,26.479 v1(47.625,26.479)
NetDisplay_10: Display.10 U601.36 | length 56.4
  Top Layer w0.254: v1(47.625,27.979) 53.428,27.979 54.115,27.292 U601.36
  Bottom Layer w0.254: Display.10 8.509,42.164 17.907,42.164 32.092,27.979 v1(47.625,27.979)
NetDisplay_11: Display.11 U601.35 | length 53.5
  Top Layer w0.254: v1(47.625,29.479) 53.452,29.479 54.839,28.092 U601.35
  Bottom Layer w0.254: Display.11 18.161,43.434 32.116,29.479 v1(47.625,29.479)
NetDisplay_12: Display.12 U601.34 | length 56.8
  Top Layer w0.254: v1(47.625,30.979) 53.857,30.979 55.944,28.892 U601.34
  Bottom Layer w0.254: Display.12 8.509,44.704 18.415,44.704 32.14,30.979 v1(47.625,30.979)
NetQ101_1: Q101.1 R101.1 R102.1 | length 4.5
  Top Layer w0.254: R102.1@53.086,36.941 R101.1 ; R102.1@53.233,37.084 Q101.1@53.233,39.148
NetQ101_3: Q101.3 R103.1 U101.N | length 13
  Top Layer w0.254: U101.N@43.815,44.069 54.229,44.069 54.356,43.942 Q101.3
NetQ102_1: Q102.1 R106.1 R107.1 | length 5.7
  Top Layer w0.254: R106.1 R107.1@87.741,27.194 ; Q102.1 87.564,24.445 88.265,25.146 88.265,27.146 R107.1
NetQ401_1: Q401.1 R401.2 | length 4.1
  Top Layer w0.254: Q401.1 81.473,15.052 83.15,16.729 83.674,16.729 R401.2
NetQ401_3: Q401.3 R402.2 U401.2 U401.3 | length 17
  Top Layer w0.254: R402.2 74.449,8.773 74.838,8.773 74.848,8.763 81.026,8.763 81.534,9.271 81.534,11.303 78.377,14.46 Q401.3 ; U401.3 U401.2
NetQ501_1: Q501.1 R501.2 | length 3.3
  Top Layer w0.254: R501.2@80.627,38.068 Q501.1
NetQ501_2: Q501.2 U501.1 | length 9.3
  Top Layer w0.254: U501.1 76.627,49.357 80.627,45.357 Q501.2
NetQ501_3: Q501.3 R502.2 R503.1 | length 6.8
  Top Layer w0.254: R502.2 R503.1 77.486,43.164 78.359,42.291 Q501.3
NetQ502_1: Q502.1 R506.2 | length 4.2
  Top Layer w0.254: R506.2 88.471,38.814 90.914,41.257 Q502.1
NetQ502_3: Q502.3 R504.2 R505.1 | length 6.6
  Top Layer w0.254: R505.1 85.471,41.021 85.614,41.164 87.646,41.164 88.646,42.164 Q502.3
NetQ503_1: Q503.1 R511.1 R512.1 | length 5.7
  Top Layer w0.4: R511.1 67.929,58.182 68.26,57.851 Q503.1
NetQ503_3: Q503.3 U501.39 | length 10.3
  Top Layer w0.4: Q503.3 69.106,52.723 69.596,53.213 69.596,56.261 71.036,57.701 U501.39
NetQ504_1: Q504.1 R513.1 R514.1 | length 5.2
  Top Layer w0.254: R514.1 65.008,44.466 R513.1@65.085,44.389 ; Q504.1 65.208,42.142 65.208,44.193 65.481,44.466 R513.1
NetQ504_3: Q504.3 R515.1 U601.24 | length 14.3
  Top Layer w0.254: R515.1 63.992,39.767 65.786,37.973 U601.24@65.786,30.542
NetR101_2: R101.2 U601.33 | length 5.7
  Top Layer w0.254: R101.2 58.611,31.829 U601.33
NetR106_2: R106.2 U601.21 | length 17.4
  Top Layer w0.254: U601.21 83.845,28.092 84.674,28.921 84.944,28.921 R106.2
NetR201_1: R201.1 R202.2 U201.4 | length 18.4
  Top Layer w0.4: U201.4 53.516,64.213 54.61,63.119 56.388,63.119 57.912,64.643 57.912,69.215 58.88,70.183 R202.2 60.912,70.183 R201.1@62.992,72.263
NetR405_1: R405.1 R407.1 TVS401.2 U401.6 | length 24.4
  Top Layer w0.4: U401.6 85.55,7.366 85.931,6.985 91.948,6.985 95.758,10.795 95.758,13.081 100.006,17.329 TVS401.2
NetR406_1: R406.1 R408.1 TVS401.1 U401.7 | length 24.5
  Top Layer w0.4: U401.7 91.694,8.636 94.615,11.557 94.615,14.224 99.6,19.209 TVS401.1
NetR501_1: R501.1 R505.2 R513.2 U501.40 VDD_EXT.1 | length 44.1
  Top Layer w0.254: R513.2 70.596,46.466 VDD_EXT.1@70.802,46.672 ; VDD_EXT.1@70.104,46.736 VDD_EXT.1 ; VDD_EXT.1@70.739,46.736 70.739,55.372 71.968,56.601 U501.40 ; VDD_EXT.1@70.993,46.482 69.469,44.958 69.469,37.338 70.723,36.084 80.645,36.084 R505.2
NetR504_1: R504.1 U501.2 | length 11.9
  Top Layer w0.254: U501.2 77.727,49.273 83.836,43.164 R504.1
NetR507_2: R507.2 SIM501.6 | length 20.4
  Top Layer w0.254: R507.2 101.054,50 114.337,63.283 SIM501.6
NetR508_1: R508.1 SIM501.3 | length 22.6
  Top Layer w0.254: R508.1 104.72,59 105.791,60.071 105.791,64.897 113.157,72.263 113.157,74.549 113.881,75.273 113.964,75.273 114.337,75.646 SIM501.3
NetR509_1: R509.1 SIM501.2 | length 19.2
  Top Layer w0.254: R509.1 102.5,65.162 103.505,66.167 105.918,66.167 110.744,70.993 110.744,74.676 111.341,75.273 111.424,75.273 111.797,75.646 SIM501.2
NetR510_1: R510.1 U501.32 | length 8.8
  Top Layer w0.4: U501.32@77.724,66.751 R510.1
NetR511_2: R511.2 U601.26 | length 31.3
  Top Layer w0.254: U601.26 64.211,32.461 v1(64.77,33.02) ; v1(64.77,48.006) 63.881,48.895 63.881,59.182 64.666,59.967 65.317,59.967 R511.2
  Bottom Layer w0.254: v1(64.77,33.02) v1(64.77,48.006)
NetU501_7: U501.7 U601.11 | length 43.1
  Top Layer w0.254: U601.11@66.675,18.923 v1(69.596,18.923) ; v1(83.227,48.26) U501.7
  Bottom Layer w0.254: v1(69.596,18.923) 71.755,18.923 76.581,23.749 76.581,43.942 80.899,48.26 v1(83.227,48.26)
Output: CN103.2 Display.1 Relay101.13 | length 216.2
  Top Layer w0.254: Display.1 2.794,23.749 2.794,5.842 7.239,1.397 115.062,1.397 118.745,5.08 118.745,43.688 116.86,45.573 CN103.2
  Top Layer w1: Relay101.13 99.314,35.433 108.331,35.433 110.236,37.338 110.236,41.795 CN103.2@114.014,45.573 ; CN103.2@113.967,45.573 CN103.2@114.014,45.573 ; CN103.2 CN103.2@114.014,45.573
V5v: C302.2 D301.1 D302.1 Display.7 E302.1 L301.1 R103.2 R104.1 R105.1 U101.P U301.3 | length 96.7
  Top Layer w0.4: R105.1 15.494,18.415 15.748,18.669 23.241,18.669 L301.1@23.749,18.669
  Top Layer w0.6: Display.7 14.732,33.401 19.304,33.401 D302.1@21.816,35.913 ; D302.1 D302.1@21.788,36.012 ; D302.1@22.041,36.138 24.765,38.862 28.321,38.862 31.519,35.664 D301.1 43.538,35.664 43.942,36.068 43.942,38.608 40.513,42.037 40.513,44.831 41.965,46.283 54.285,46.283 R103.2
  Top Layer w0.8: L301.1@23.241,18.034 23.241,18.669 23.241,22.679 24.003,23.441 24.003,25.031 26.416,27.444 U301.3
V12v: C101.2 C201.2 C301.2 D102.1 D301.2 E201.1 E301.1 F101.2 R301.2 Relay101.16 U201.1 U301.1 V12v.1 | length 189.5
  Top Layer w0.254: V12v.1 19.097,55.753 E301.1@19.177,55.753
  Top Layer w0.6: R301.2 20.574,43.053 21.59,44.069 U301.1@26.416,44.069 ; U301.1 26.897,44.423 29.945,44.423 31.646,46.124 D301.2 ; D102.1 Relay101.16@96.901,25.499
  Top Layer w0.8: U301.1 26.416,44.069 26.416,53.975 24.765,55.626 19.224,55.626 E301.1 19.097,55.753 16.383,58.467 16.383,61.976 17.272,62.865 25.527,62.865 28.448,59.944 37.846,59.944 44.165,66.263 U201.1
  Bottom Layer w1: E201.1@33.147,59.944 91.567,59.944 93.98,57.531 93.98,28.321 Relay101.16
VDD: C401.1 C601.1 C602.1 C603.1 C604.1 J301.2 Q401.2 R403.1 R404.1 R405.2 R502.1 R506.1 R515.2 R601.2 U401.8 U601.5 U601.17 U601.27 U601.38 VDD.1 | length 243.6
  Top Layer w0.254: v1(72.136,38.1) R502.1@72.136,41.164
  Top Layer w0.4: R601.2 49.895,6.62 54.229,2.286 67.818,2.286 68.578,3.046 R403.1 83.437,3.046 83.947,3.556 ; C601.1 48.907,24.396 50.203,25.692 U601.38 59.982,25.692 63.411,29.121 ; R515.2 58.658,41.767 57.531,40.64 57.531,38.735 58.801,37.465 62.103,37.465 63.411,36.157 63.411,35.052 U601.27 63.411,29.121 ; C602.1@61.811,14.732 U601.5 61.811,21.044 65.659,24.892 ; VDD.1 86.296,33.909 R506.1 ; C603.1@72.771,24.892 U601.17 65.659,24.892 ; C603.1 73.26,24.542 73.26,13.735 73.726,13.269 73.726,13.246 73.926,13.046 R404.1 75.657,13.046 76.2,13.589 76.2,16.129 77.089,17.018 80.561,17.018 Q401.2 80.838,16.952 80.904,17.018 81.28,17.018 83.312,19.05 87.249,19.05 88.9,17.399 88.9,14.097 88.646,13.843 86.36,13.843 84.696,12.179 U401.8 83.842,9.906 83.742,9.806 83.72,9.806 82.804,8.89 82.804,4.699 83.947,3.556 ; R405.2 89.138,3.556 83.947,3.556 ; 63.411,29.121 65.659,26.873 65.659,24.892
  Top Layer w0.6: J301.2 46.609,24.892 47.808,23.693 48.836,23.693 C601.1
  Bottom Layer w0.6: J301.2 70.612,24.892 72.136,26.416 VDD.1 v1(72.136,38.1)
VGSM: C203.1 C204.2 C205.2 C206.2 FB101.2 U501.34 U501.35 VGSM.1 ZD201.2 | length 35.9
  Top Layer w0.254: VGSM.1 VGSM.1@72.517,78.486
  Top Layer w0.4: C206.2 69.977,81.026 VGSM.1@72.517,78.486
  Top Layer w0.6: C206.2 68.187,78.486 C205.2 69.596,77.077 69.596,73.406 70.17,72.832 70.342,72.832 70.792,72.382 C203.1
  Top Layer w0.8: FB101.2 ZD201.2@70.485,66.929 ; ZD201.2 70.612,67.719 70.612,71.702 C203.1 72.39,71.882 73.777,70.495 U501.34 U501.35@73.777,62.357
VIN: CN101.1 CN401.4 D101.1 Relay101.6 Relay101.9 SW101.1 SW101.2 | length 172
  Top Layer w1: CN101.1 8.254,73.153 6.207,75.2 SW101.2 4.318,78.105 4.762,78.549 D101.1@10.396,78.549 ; Relay101.9 99.441,43.18 Relay101.6
  Bottom Layer w1: CN101.1 104.284,68.309 107.315,65.278 107.315,42.037 104.712,39.434 104.712,38.291 Relay101.6 104.654,37.967 104.654,36.697 CN401.4@114.109,27.241
pads on no net: Display.13 Display.14 SIM501.5 U501.3 U501.4 U501.5 U501.6 U501.9 U501.10 U501.11 U501.12 U501.14 U501.20 U501.22 U501.23 U501.24 U501.25 U501.26 U501.28 U501.29 U501.38 U501.42 U601.12 U601.13 U601.16 U601.19 U601.20 U601.22 U601.23 U601.25 U601.29 U601.30 U601.31 U601.32 U601.40 U601.41 U601.44

## Polygon pours and split planes (outlines as drawn)
GND on Top Layer "GND_L01_P003" (solid, pour order 3): 118.618,83.058 cw(c118.618,79.502) 122.174,79.502 122.174,60.706 cw(c119.634,60.706) 119.634,58.166 107.188,58.166 ccw(c107.188,55.626) 104.648,55.626 104.648,48.514 cw(c102.489,48.514) 102.489,46.355 76.581,46.355 ccw(c76.581,43.815) 74.041,43.815 74.041,32.639 ccw(c76.2,32.639) 76.2,30.48 119.507,30.48 cw(c119.507,27.94) 122.047,27.94 122.047,2.794 cw(c119.507,2.794) 119.507,0.254 28.321,0.254 cw(c28.321,2.54) 26.035,2.54 26.035,13.97 ccw(c24.257,13.97) 24.257,15.748 1.778,15.748 cw(c1.778,17.526) 0,17.526 0,67.564 cw(c2.54,67.564) 2.54,70.104 42.291,70.104 ccw(c42.291,72.644) 44.831,72.644 44.831,80.772 cw(c47.117,80.772) 47.117,83.058
no net on Top Layer "NONET_L01_P000" (solid, pour order 0): 122.127,83.127
GND on Bottom Layer "GND_L02_P002" (solid, pour order 2): 122.127,83.127 2.54,83.127 ccw(c2.54,80.587) 0,80.587 0,2.54 ccw(c2.54,2.54) 2.54,0 119.634,0 ccw(c119.634,2.54) 122.174,2.54 122.174,80.518 ccw(c119.634,80.518) 119.634,83.058 112.776,83.058

## Keep-outs
Keep-Out Layer:
  the board outline again, w0.254

## Silkscreen, mask and mechanical layers (free items; w line width, h text height)
Top Overlay:
  lines w0.254: 90.805,23.368 91.694,24.257 92.583,23.368
  lines w0.3: 13.462,29.718 14.224,30.48 13.462,31.242 13.462,29.718

## Text inside footprints (layer, text, board x,y; h text height)
CN101: Top Overlay "+  -" at 11.176,68.516 h1.5 r270
CN102: Top Overlay "O      C" at 11.938,23.368 h1.5 r270
CN103: Top Overlay "1   2" at 110.5,39.656 h1.5 r90
CN401: Top Overlay "GND  A  B  VCC" at 110.5,9.906 h1.5 r90
E201: Top Overlay "+" at 32.397,63.279 h1.5 r270
E202: Top Overlay "+" at 51.985,52.209 h1.5
E301: Top Overlay "+" at 18.427,59.648 h1.5 r270
E302: Top Overlay "+" at 29.771,30.722 h1.5 r180